# EAGLE board boarduino (EAGLE 4.13)
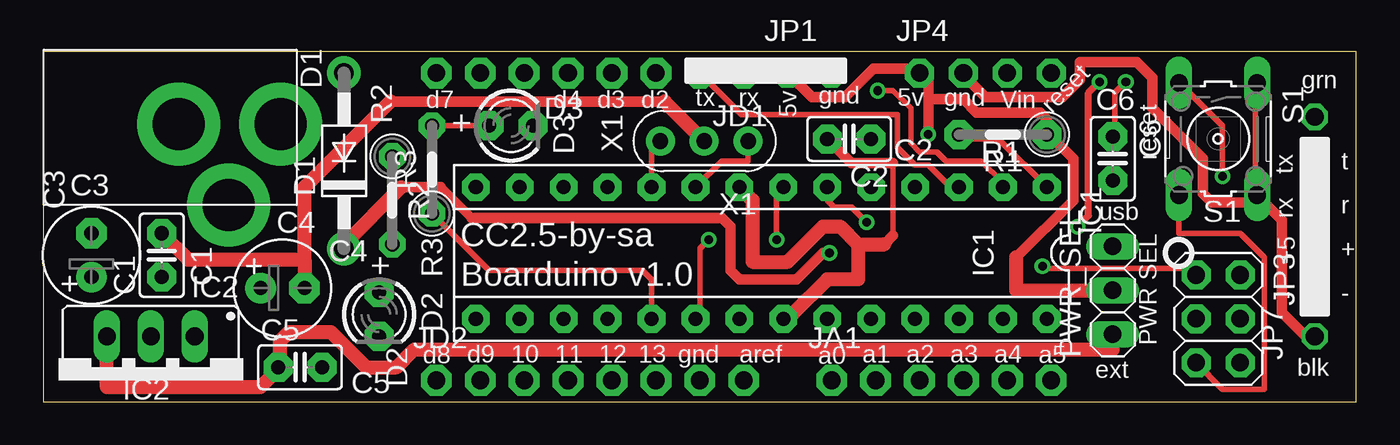
[diagram p0: board, top side]
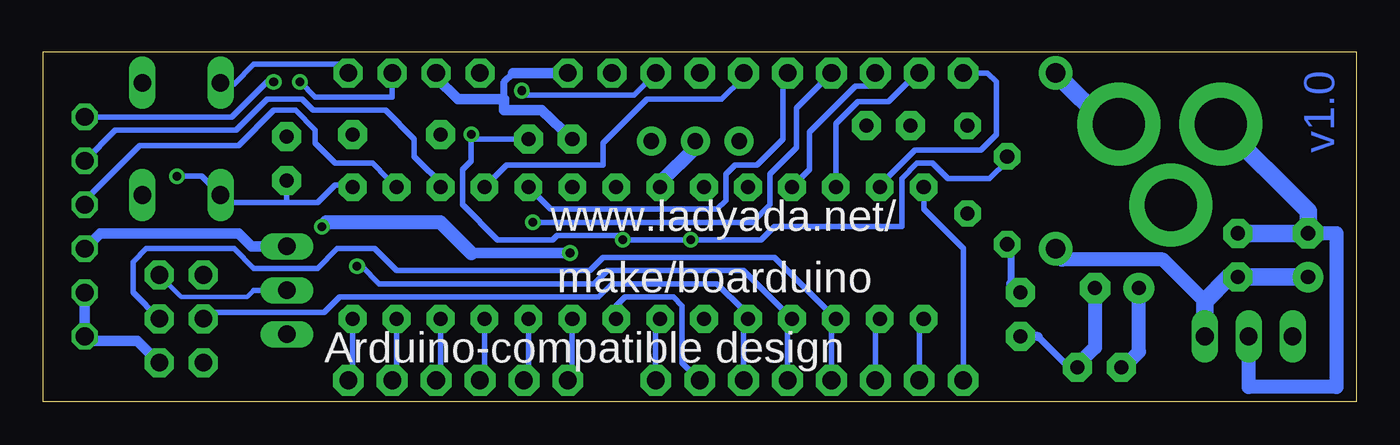
[diagram p1: board, bottom side, seen from below]

Size 75.93 x 20.24 mm. Coordinates in mm from the lower left corner, seen from the top.
Outline: 0,0 75.93,0 75.93,20.24 0,20.24 0,0
Copper layers (1*16): Top 0.035mm / dielectric 1.5mm / Bottom 0.035mm
Design rules "default": minimum track width 10mil, minimum drill 19mil, track to track 10mil, track to pad 10mil, pad to pad 10mil, via to via 10mil, smd to smd 0mil, copper to edge 10mil, drill to drill 8mil, minimum pad ring 10mil, minimum via ring 8mil, stop-mask expansion 4mil, vias tented up to drill 0mil, thermal gap 10mil

## Footprints (pad centres in the part's own frame; a part is rotated, then mirrored left to right if it is on the bottom)
C025-025X050 = drill 0.813 pad 1.676 octagon: 1 -1.27,0; 2 1.27,0
E2,5-6 = drill 0.813 pad 1.778 round: + -1.27,0 | drill 0.813 pad 1.778 octagon: - 1.27,0
DO41-10 = drill 1.118 pad 1.93 round: A 5.08,0; C -5.08,0
LED3MM = drill 0.813 pad 1.676 octagon: A -1.27,0; K 1.27,0
DIL28/3 = drill 0.813 pad 1.6 octagon: 1 -16.51,-3.81; 2 -13.97,-3.81; 3 -11.43,-3.81; 4 -8.89,-3.81; 5 -6.35,-3.81; 6 -3.81,-3.81; 7 -1.27,-3.81; 8 1.27,-3.81; 9 3.81,-3.81; 10 6.35,-3.81; 11 8.89,-3.81; 12 11.43,-3.81; 13 13.97,-3.81; 14 16.51,-3.81; 15 16.51,3.81; 16 13.97,3.81; 17 11.43,3.81; 18 8.89,3.81; 19 6.35,3.81; 20 3.81,3.81; 21 1.27,3.81; 22 -1.27,3.81; 23 -3.81,3.81; 24 -6.35,3.81; 25 -8.89,3.81; 26 -11.43,3.81; 27 -13.97,3.81; 28 -16.51,3.81
78XXS = drill 1.016 long: GND 0,-2.54; IN -2.54,-2.54; OUT 2.54,-2.54
PJ-102A = drill 3 pad 4.8 round: RING 0.1,-3.39; RING_SW -4.6,-6.29; TIP 0.1,-9.29
1X06-CLEANBIG = drill 1.016 pad 1.778 octagon: 1 -6.35,0; 2 -3.81,0; 3 -1.27,0; 4 1.27,0; 5 3.81,0; 6 6.35,0
1X08-CLEANBIG = drill 1.016 pad 1.778 octagon: 1 -8.89,0; 2 -6.35,0; 3 -3.81,0; 4 -1.27,0; 5 1.27,0; 6 3.81,0; 7 6.35,0; 8 8.89,0
1X02-CB = drill 1.016 pad 1.676 octagon: 1 -1.27,0; 2 1.27,0
2X03 = drill 1.016 pad 1.676 octagon: 1 -2.54,-1.27; 2 -2.54,1.27; 3 0,-1.27; 4 0,1.27; 5 2.54,-1.27; 6 2.54,1.27
1X04-CB = drill 1.016 pad 1.676 octagon: 1 -3.81,0; 2 -1.27,0; 3 1.27,0; 4 3.81,0
1X06-CLEAN = drill 1.016 octagon: 1 -6.35,0; 2 -3.81,0; 3 -1.27,0; 4 1.27,0; 5 3.81,0; 6 6.35,0
1X03 = drill 1.016 long: 1 -2.54,0; 2 0,0; 3 2.54,0
0207/5V = drill 0.813 pad 1.676 octagon: 1 -2.54,0; 2 2.54,0
0207/5V' = drill 0.813 pad 1.524 octagon: 1 -2.54,0; 2 2.54,0
B3F-10XX = drill 1.016 long: 1 -3.251,2.261; 2 3.251,2.261; 3 -3.251,-2.261; 4 3.251,-2.261
CERM_OSC = drill 0.9 pad 1.676 round: P$1 -2.54,0; P$2 0,0; P$3 2.54,0

## Placement (x,y rotation side)
C1  0.1uF  [C025-025X050]  6.85,8.47 90 top
C2  0.1uF  [C025-025X050]  46.6,15.2 180 top
C3  10uF/25V  [E2,5-6]  2.79,8.47 90 top
C4  100/6VuF  [E2,5-6]  13.84,6.57 0 top
C5  0.1uF  [C025-025X050]  14.85,1.99 0 top
C6  0.1uF  [C025-025X050]  61.84,14.06 270 top
D1  1N4001  [DO41-10]  17.39,13.93 90 top
D2  [LED3MM]  19.43,5.04 270 top
D3  Green  [LED3MM]  27.05,15.96 0 top
IC1  ATMEGA168P  [DIL28/3]  41.52,8.6 180 top
IC2  [78XXS]  6.22,1.23 180 top
J1  2.1MMJACK  [PJ-102A]  4.44,15.96 90 top
JA1  [1X06-CLEANBIG]  51.94,1.23 0 top
JD1  [1X08-CLEANBIG]  31.62,19.01 180 top
JD2  [1X08-CLEANBIG]  31.62,1.23 0 top
JP1  [1X02-CB]  44.32,19.01 0 top
JP3  [2X03]  67.94,4.79 270 top
JP4  [1X04-CB]  54.48,19.01 0 top
JP7  [1X06-CLEAN]  73.53,10.12 90 top
PWR_SEL  [1X03]  61.84,6.44 90 top
R1  10K  [0207/5V]  55.49,15.46 180 top
R2  1.0 K  [0207/5V']  20.19,11.65 270 top
R3  1.0 K  [0207/5V']  22.47,13.42 90 top
S1  RESET  [B3F-10XX]  67.94,15.2 270 top
X1  16.00MHz  [CERM_OSC]  38.22,15.07 180 top

## Library data of the parts
C1-C6 D1-D3 J1 R2 R3 = minimidi
IC1 = avr
IC2 = v-reg
JA1 JD1 JD2 JP1 JP4 JP7 = carduino
JP3 = pinhead-ez
PWR_SEL = pinhead
R1 = rcl-ez
S1 = switch-omron
X1 = digg

## Nets
+5V: C2.1 IC1.7 IC1.20 JP1.1 JP3.2 JP4.1 PWR_SEL.2 R1.1 R2.1
+9V: C1.1 C3.+ D1.C IC2.IN JP4.3
ANALOG0: IC1.23 JA1.1
ANALOG1: IC1.24 JA1.2
ANALOG2: IC1.25 JA1.3
ANALOG3: IC1.26 JA1.4
ANALOG4: IC1.27 JA1.5
ANALOG5: IC1.28 JA1.6
AREF: IC1.21 JD2.8
DIGITAL2: IC1.4 JD1.3
DIGITAL3: IC1.5 JD1.4
DIGITAL4: IC1.6 JD1.5
DIGITAL5: IC1.11 JD1.6
DIGITAL6: IC1.12 JD1.7
DIGITAL7: IC1.13 JD1.8
DIGITAL8: IC1.14 JD2.1
DIGITAL9: IC1.15 JD2.2
DIGITAL10: IC1.16 JD2.3
GND: C1.2 C2.2 C3.- C4.- C5.2 D2.K D3.K IC1.8 IC1.22 IC2.GND J1.RING JD2.7 JP1.2 JP3.6 JP4.2 JP7.1 JP7.2 S1.1 S1.2 X1.P$2
MISO: IC1.18 JD2.5 JP3.1
MOSI: IC1.17 JD2.4 JP3.4
N$1: IC1.9 X1.P$1
N$2: IC1.10 X1.P$3
N$3: D2.A R2.2
N$4: D3.A R3.2
N$17: D1.A J1.TIP
N$22: C4.+ C5.1 IC2.OUT PWR_SEL.1
RST: C6.2 IC1.1 JP3.5 JP4.4 R1.2 S1.3 S1.4
RTS#: C6.1 JP7.6
RXD: IC1.2 JD1.1 JP7.4
SCK: IC1.19 JD2.6 JP3.3 R3.1
TXD: IC1.3 JD1.2 JP7.5
USB_5V: JP7.3 PWR_SEL.3

## Tracks (layer width: path | path; a pad name or v marks a point on that pad's centre or on a via)
+5V  (via drill 0.5)
  Top 0.305: IC1.20 37.97,4.79 37.97,8.85 v38.48,9.36 | 42.79,12.66 IC1.7 42.41,12.03 v42.41,9.36 | JP4.1 50.41,19.27 | R1.1 58.16,15.46
  Top 0.61: 56.26,8.34 59.56,11.65 59.56,14.06 58.16,15.46 | v51.18,15.46 51.18,17.49 | 51.18,17.49 51.18,18.5 JP4.1 | JP1.1 44.45,17.61 46.35,17.61 48,19.27 50.41,19.27 | R1.1 58.03,16.34 57.65,16.73 53.97,16.73 53.21,17.49 51.18,17.49
  Top 0.813: 56.26,8.34 56.26,6.44 PWR_SEL.2
  Bottom 0.254: JP3.2 67.94,6.06 64.13,6.06 63.75,6.44
  Bottom 0.305: PWR_SEL.2 63.75,6.44 | R2.1 20.19,13.93 21.2,12.92 23.62,12.92 24.51,13.8 25.39,13.8 26.28,12.92 26.28,10.12 33.65,10.12 34.41,9.36 v38.48,9.36 v42.41,9.36 42.67,9.61 46.22,9.61 46.48,9.36 49.65,9.36 51.68,11.39 51.68,13.42 51.18,13.93 v51.18,15.46 51.18,15.33 51.05,15.2 C2.1
+9V  (via drill 0.5)
  Top 0.406: v59.81,10.12 60.45,10.76 60.45,17.87 v61.08,18.5 | 45.08,8.6 v45.46,8.6
  Top 0.508: 22.98,12.41 24.76,10.63 | D1.C 17.39,9.11
  Top 0.61: 20.7,12.41 22.98,12.41 | 24.76,10.63 38.73,10.63 39.24,10.63 39.75,10.12 39.75,7.58 40.25,7.07 43.56,7.07 45.08,8.6
  Top 0.813: 17.39,9.11 20.7,12.41
  Bottom 0.305: v61.08,18.5 60.19,17.61 55.75,17.61 JP4.3
  Bottom 0.406: 59.56,10.38 v59.81,10.12
  Bottom 0.508: C1.1 7.36,7.2 | D1.C 17.27,8.85 17.27,8.47 17.01,8.22
  Bottom 0.61: v45.46,8.6 51.18,8.6
  Bottom 0.813: 59.56,10.38 52.95,10.38 51.18,8.6 | 8.76,5.8 11.17,8.22 17.01,8.22
  Bottom 1.016: C3.+ C1.1 | IC2.IN 8.76,5.8 7.36,7.2
ANALOG0
  Bottom 0.305: JA1.1 45.33,1.23 IC1.23
ANALOG1
  Bottom 0.305: JA1.2 47.87,1.23 IC1.24
ANALOG2
  Bottom 0.305: JA1.3 50.41,1.23 IC1.25
ANALOG3
  Bottom 0.305: JA1.4 52.95,1.23 IC1.26
ANALOG4
  Bottom 0.305: JA1.5 55.49,1.23 55.49,1.99 IC1.27
ANALOG5
  Bottom 0.305: JA1.6 58.03,1.23 58.03,2.25 IC1.28
AREF
  Bottom 0.305: JD2.8 40.51,4.53 IC1.21
DIGITAL2
  Bottom 0.305: JD1.3 35.43,18.76 36.7,17.49 41.02,17.49 43.56,14.95 43.56,13.68 49.14,13.68 IC1.4
DIGITAL3
  Bottom 0.305: JD1.4 33.14,18.76 33.14,15.2 34.67,13.68 35.94,13.68 36.44,13.17 36.44,11.65 36.95,11.14 46.6,11.14 IC1.5
DIGITAL4  (via drill 0.5)
  Top 0.305: v47.62,10.38 46.73,11.27 45.72,11.27 45.33,11.65 IC1.6
  Bottom 0.305: JD1.5 32.38,16.98 32.38,14.69 33.9,13.17 33.9,11.39 34.92,10.38 v47.62,10.38
DIGITAL5
  Bottom 0.305: JD1.6 27.81,18.38 27.93,18.25 28.95,18.25 31.62,15.58 31.62,13.42 IC1.11
DIGITAL6
  Bottom 0.305: IC1.12 30.09,16.09 28.82,17.36 27.05,17.36 25.27,19.14 JD1.7
DIGITAL7
  Bottom 0.305: IC1.13 27.55,12.54 25.52,14.57 21.71,14.57 20.82,15.46 20.82,18.5 21.33,19.01 JD1.8
DIGITAL8
  Bottom 0.305: JD2.1 22.73,8.85 25.01,11.14 IC1.14 25.01,12.66
DIGITAL9
  Bottom 0.305: IC1.15 24.76,4.79 25.27,4.28 JD2.2
DIGITAL10
  Bottom 0.305: IC1.16 27.55,4.53 27.81,4.28 JD2.3
GND
  Top 0.305: 73.02,3.77 JP7.1 | IC1.22 42.79,5.04 43.3,5.04 | 49.14,9.61 49.14,13.8 | 28.32,17.36 D3.K | S1.1 70.15,18.5 70.1,18.5 70.1,12.05 S1.2 70.23,11.92 70.23,11.9 70.23,11.52 70.1,11.52
  Top 0.61: 73.02,3.77 71.62,5.17 71.62,10.5 70.23,11.9 | C2.2 46.73,13.8 49.14,13.8 | 48.64,9.11 49.14,9.61 | 35.94,17.36 28.32,17.36 20.06,17.36 | JP4.2 53.21,18.88 54.48,17.61 58.92,17.61 59.94,18.63 59.94,19.65 63.24,19.65 64.13,18.76 64.13,16.98 67.05,14.06 67.05,12.03 67.56,11.52 70.1,11.52
  Top 0.813: 35.94,17.36 X1.P$2 | 47.11,9.11 46.1,10.12 45.08,10.12 43.05,8.09 41.02,8.09 41.02,11.65 IC1.8 | 47.11,9.11 47.11,7.07 45.33,7.07 43.3,5.04 | 47.11,9.11 48.64,9.11 | 20.06,17.36 15.11,12.41 15.11,8.22 | 15.11,8.22 C4.- | 15.11,8.22 8.38,8.22 C1.2
  Bottom 0.305: 40,12.41 IC1.8 40.25,12.66 | JD2.7 38.98,2.25 38.98,5.55 39.49,6.06 42.29,6.06 42.79,5.55 IC1.22 | X1.P$2 38.22,14.69 | JP7.1 73.53,3.52 | 53.21,18.76 JP4.2
  Bottom 0.406: 48.76,19.01 49.27,18.5 49.27,17.49 | 16.38,1.74 18.41,3.77
  Bottom 0.508: 16.25,1.99 C5.2 16.38,1.74 | 18.41,3.77 D2.K
  Bottom 0.61: C2.2 47.11,16.85 49.27,16.85 49.27,17.49 51.94,17.49 53.21,18.76 | JP3.6 70.48,3.52 73.53,3.52 | JP7.1 JP7.2 | 48.76,19.01 JP1.2
  Bottom 0.813: 38.22,14.69 40.25,12.66 | C3.- 1.14,9.74 1.14,0.85 6.22,0.85 IC2.GND | C4.- 15.11,3.14 16.25,1.99
  Bottom 1.016: J1.RING 2.79,11.02 C3.- C1.2
MISO  (via drill 0.5)
  Top 0.305: v57.78,7.84 57.78,7.71 66.29,7.71 JP3.1
  Bottom 0.305: JD2.5 32.89,5.04 | 32.89,5.04 IC1.18 | 32.89,5.04 35.43,7.58 43.3,7.58 44.06,6.82 56.51,6.82 57.53,7.84 v57.78,7.84
MOSI
  Bottom 0.305: JD2.4 30.35,5.04 | 30.35,5.04 IC1.17 | 30.35,5.04 33.65,8.34 43.56,8.34 44.32,7.58 55.49,7.58 56.76,8.85 58.92,8.85 60.07,7.71 63.75,7.71 64.89,8.85 69.97,8.85 70.73,8.09 70.73,6.31 JP3.4
N$1
  Top 0.305: IC1.9 39.24,13.93 40.76,13.93 X1.P$1
N$2
  Top 0.305: X1.P$3 35.17,14.57 IC1.10
N$3
  Bottom 0.406: 19.93,6.82 19.93,9.11
  Bottom 0.61: 19.93,9.11 R2.2 | D2.A 19.93,6.82
N$4
  Top 0.305: 22.22,15.96 R3.2 D3.A
N$17
  Bottom 0.61: J1.TIP 13.63,15.96
  Bottom 1.016: 13.33,15.96 13.63,15.96 14.35,15.96 D1.A
N$22
  Top 0.508: 13.71,2.12 C5.1 13.58,1.87
  Top 0.813: PWR_SEL.1 61.84,3.01 21.46,3.01 20.44,1.99 18.66,1.99 16.63,4.03 14.22,4.03 13.71,3.52 13.71,2.12 | IC2.OUT 3.68,0.85 12.57,0.85 13.58,1.87
  Bottom 0.508: C5.1 13.46,1.99
  Bottom 0.813: C4.+ 12.57,2.88 13.46,1.99
RST  (via drill 0.5)
  Top 0.305: JP3.5 68.19,0.72 70.61,0.72 70.61,8.34 69.21,9.74 65.65,9.74 65.65,11.9 65.73,11.9 S1.4 | R1.2 52.95,15.2 55.24,15.2 IC1.1 | S1.3 65.7,18.45 68.19,15.96 v68.19,13.04
  Bottom 0.305: 61.84,11.52 60.07,11.52 59.05,12.54 58.03,12.54 IC1.1 | 61.84,11.52 C6.2 | JP4.4 58.8,19.52 63.75,19.52 64.89,18.38 65.65,18.38 65.65,18.43 S1.3 | 61.84,11.52 65.4,11.52 65.65,11.77 65.65,11.92 S1.4 66.77,13.04 v68.19,13.04
RTS#  (via drill 0.5)
  Top 0.305: C6.1 61.97,15.2 61.97,17.87 v62.61,18.5
  Bottom 0.305: JP7.6 65.02,16.47 62.99,18.5 v62.61,18.5
RXD  (via drill 0.5)
  Top 0.305: v48.26,18 49.14,18 50.16,16.98 50.16,14.95 50.67,14.44 51.68,14.44 52.19,13.93 54.22,13.93 55.49,12.66 IC1.2
  Bottom 0.305: JP7.4 73.53,11.65 70.35,14.82 64.64,14.82 62.61,16.85 61.34,16.85 60.19,15.71 60.19,14.95 59.05,13.8 56.89,13.8 56,12.92 55.24,12.92 55.49,12.66 IC1.2 | JD1.1 41.78,17.74 48.26,17.74 v48.26,18
SCK
  Top 0.305: R3.1 25.78,7.58 34.67,7.58 35.17,7.07 IC1.19
  Bottom 0.305: 35.43,5.3 JD2.6 | IC1.19 35.17,5.04 35.43,5.3 | 35.43,5.3 36.95,6.82 43.05,6.82 43.81,6.06 58.8,6.06 59.69,5.17 66.67,5.17 JP3.3
TXD
  Top 0.305: JD1.2 40.38,16.6 49.4,16.6 49.4,14.69 50.41,13.68 51.18,13.68 52.45,12.41 IC1.3
  Bottom 0.305: JP7.5 71.75,15.71 64.77,15.71 62.99,17.49 60.96,17.49 60.32,16.85 56.13,16.85 54.48,15.2 54.48,14.19 52.7,12.41 IC1.3
USB_5V
  Bottom 0.61: JP7.3 72.64,9.74 64.64,9.74 63.88,8.98 PWR_SEL.3

## Text on the board
Bottom: v1.0
tPlace: D1 | d7 | d4 | d3 | d2 | tx | rx | 5v | gnd | Vin | C6 | grn | gnd | 5v | reset | reset | R2 | + | C2 | D3 | X1 | R1 | C3 | tx | t | usb | C4 | rx | r | S1 | CC2.5-by-sa | +5 | + | C1 | + | R3 | Boarduino v1.0 | IC1 | - | - | D2 | PWR SEL | C5 | d8 | d9 | 10 | 11 | 12 | 13 | gnd | aref | a0 | a1 | a2 | a3 | a4 | a5 | blk | ext | IC2
bPlace: www.ladyada.net/ | make/boarduino | Arduino-compatible design